# Altium PCB led_driver.PcbDoc
Units mm, origin at the board's own origin, x right, y up, seen from the top; angles counter-clockwise.
Board outline 42 x 44 mm, 4 copper layers (Top Layer, Layer 1, Layer 2, Bottom Layer), stack 0.603 mm thick; 25 components, 22 nets, 109 pads, 89 vias.
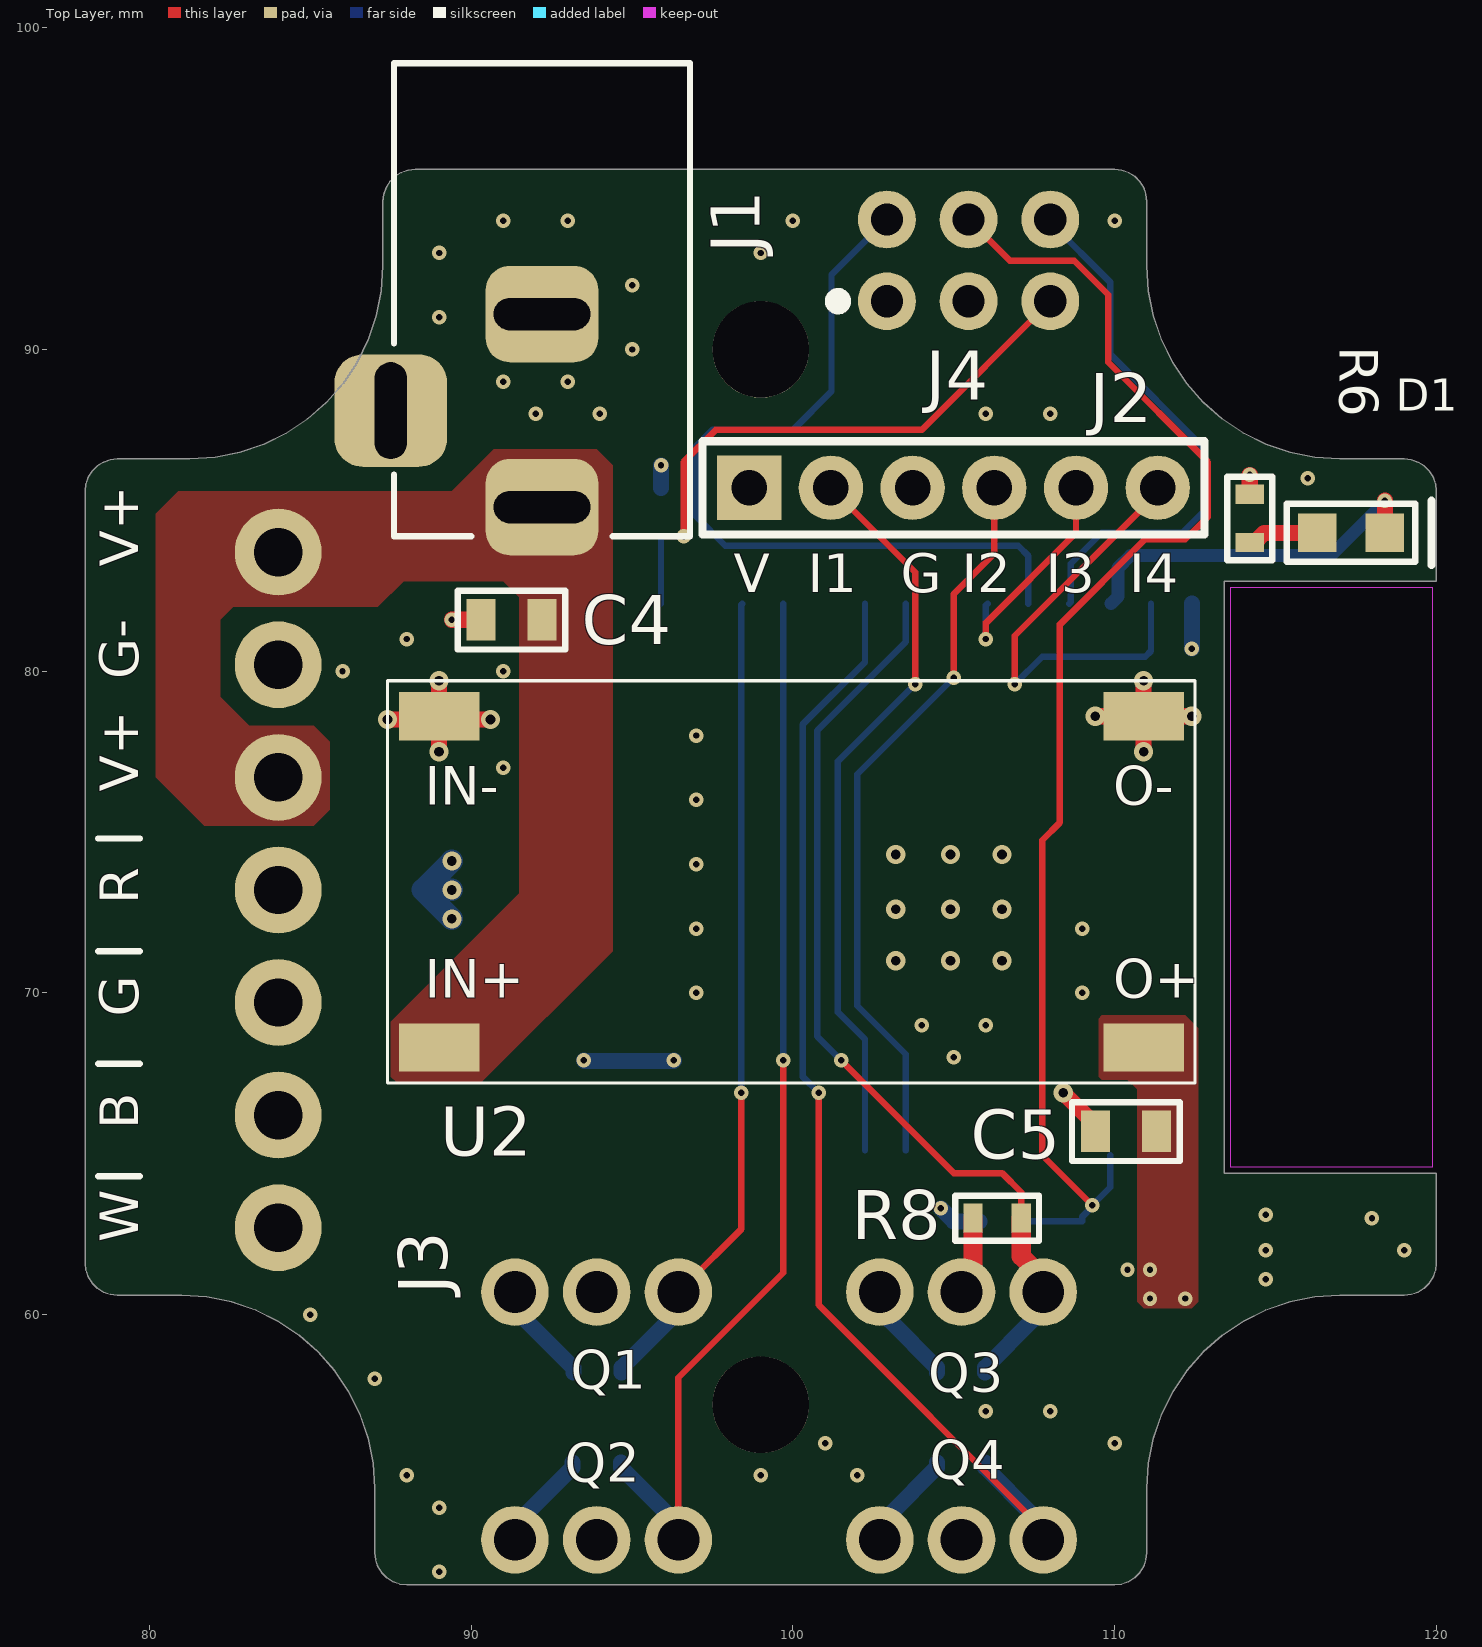
[diagram p0: Top Layer view]
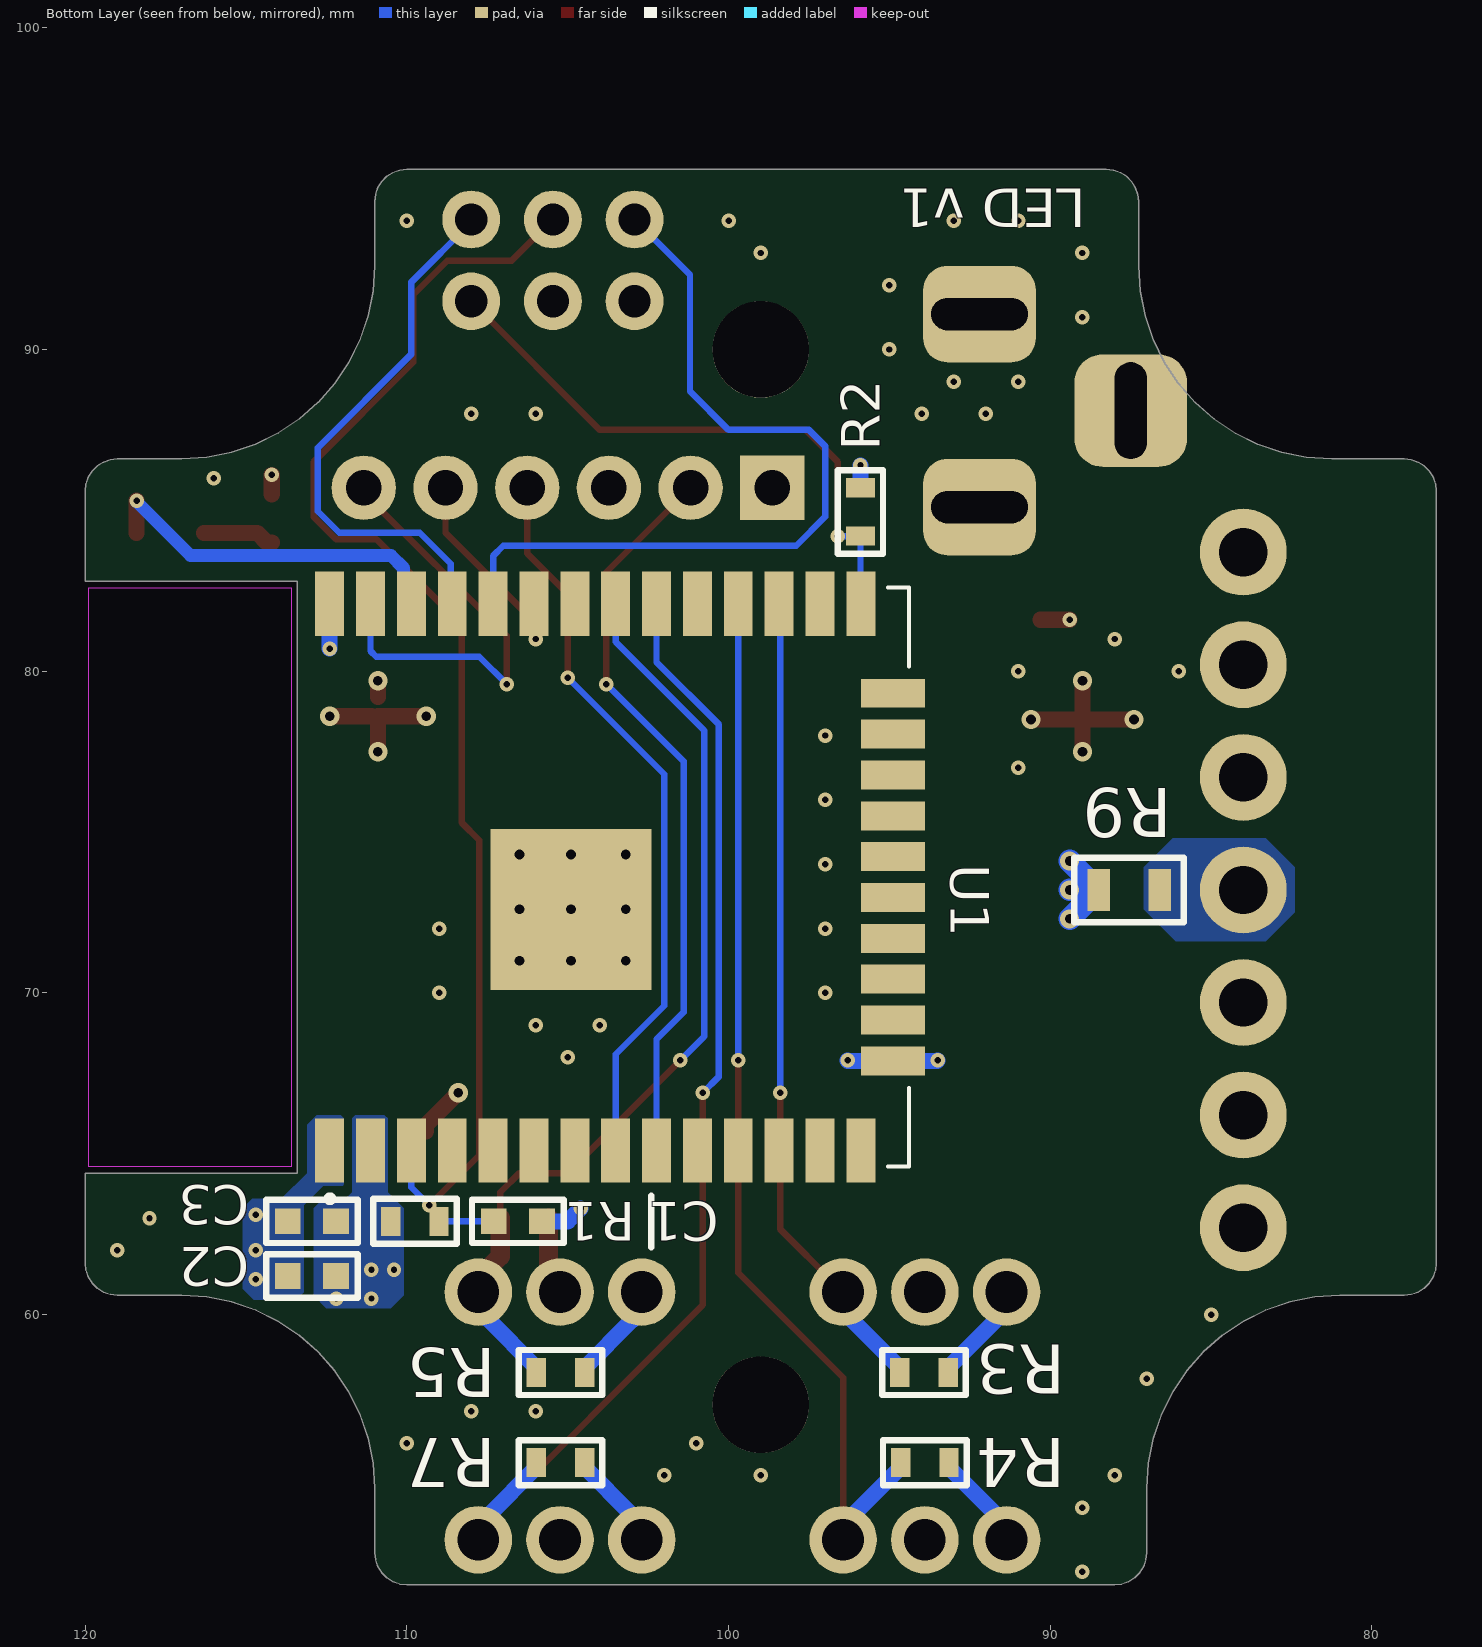
[diagram p1: Bottom Layer view, seen from below]
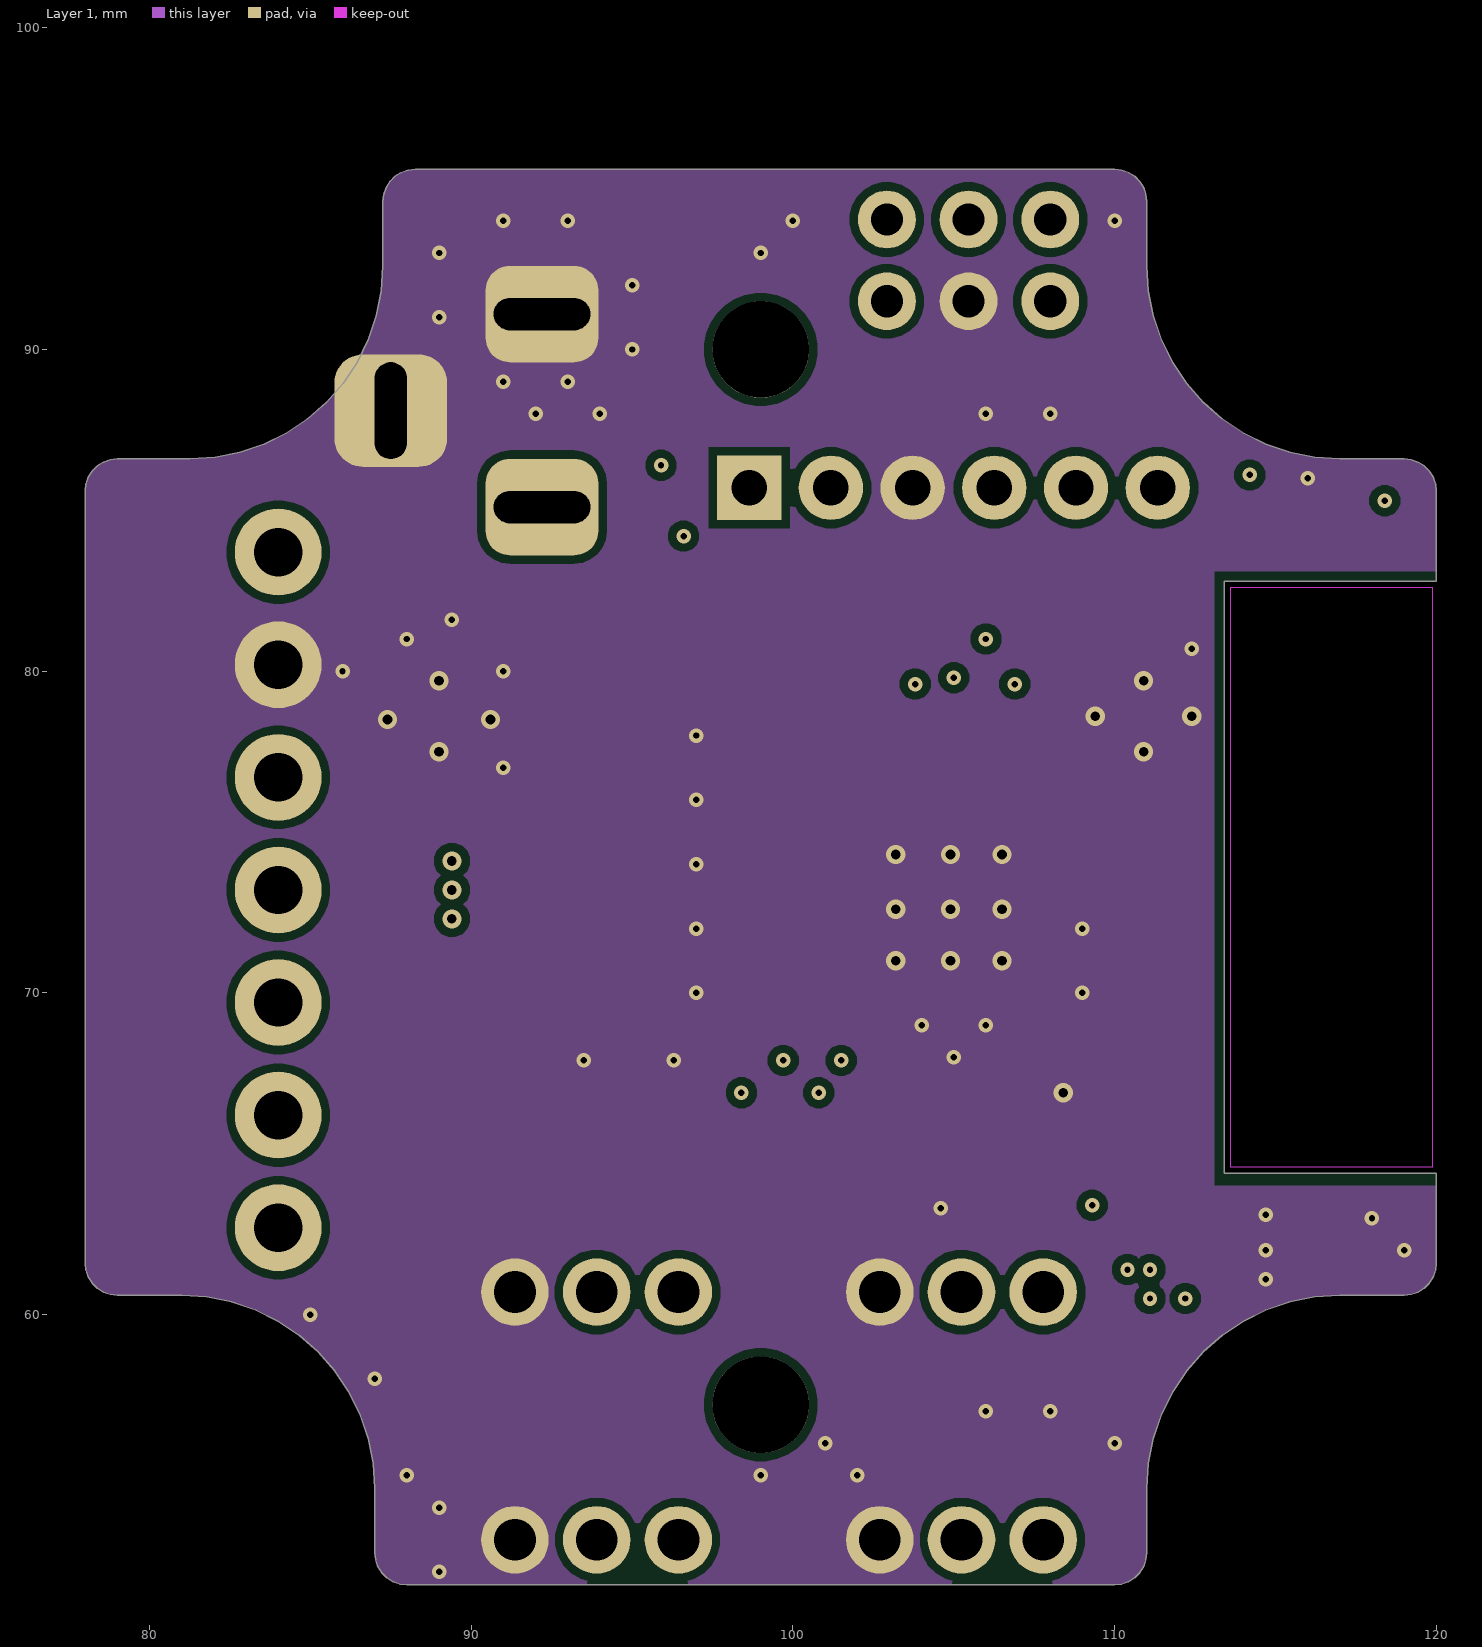
[diagram p2: Layer 1]
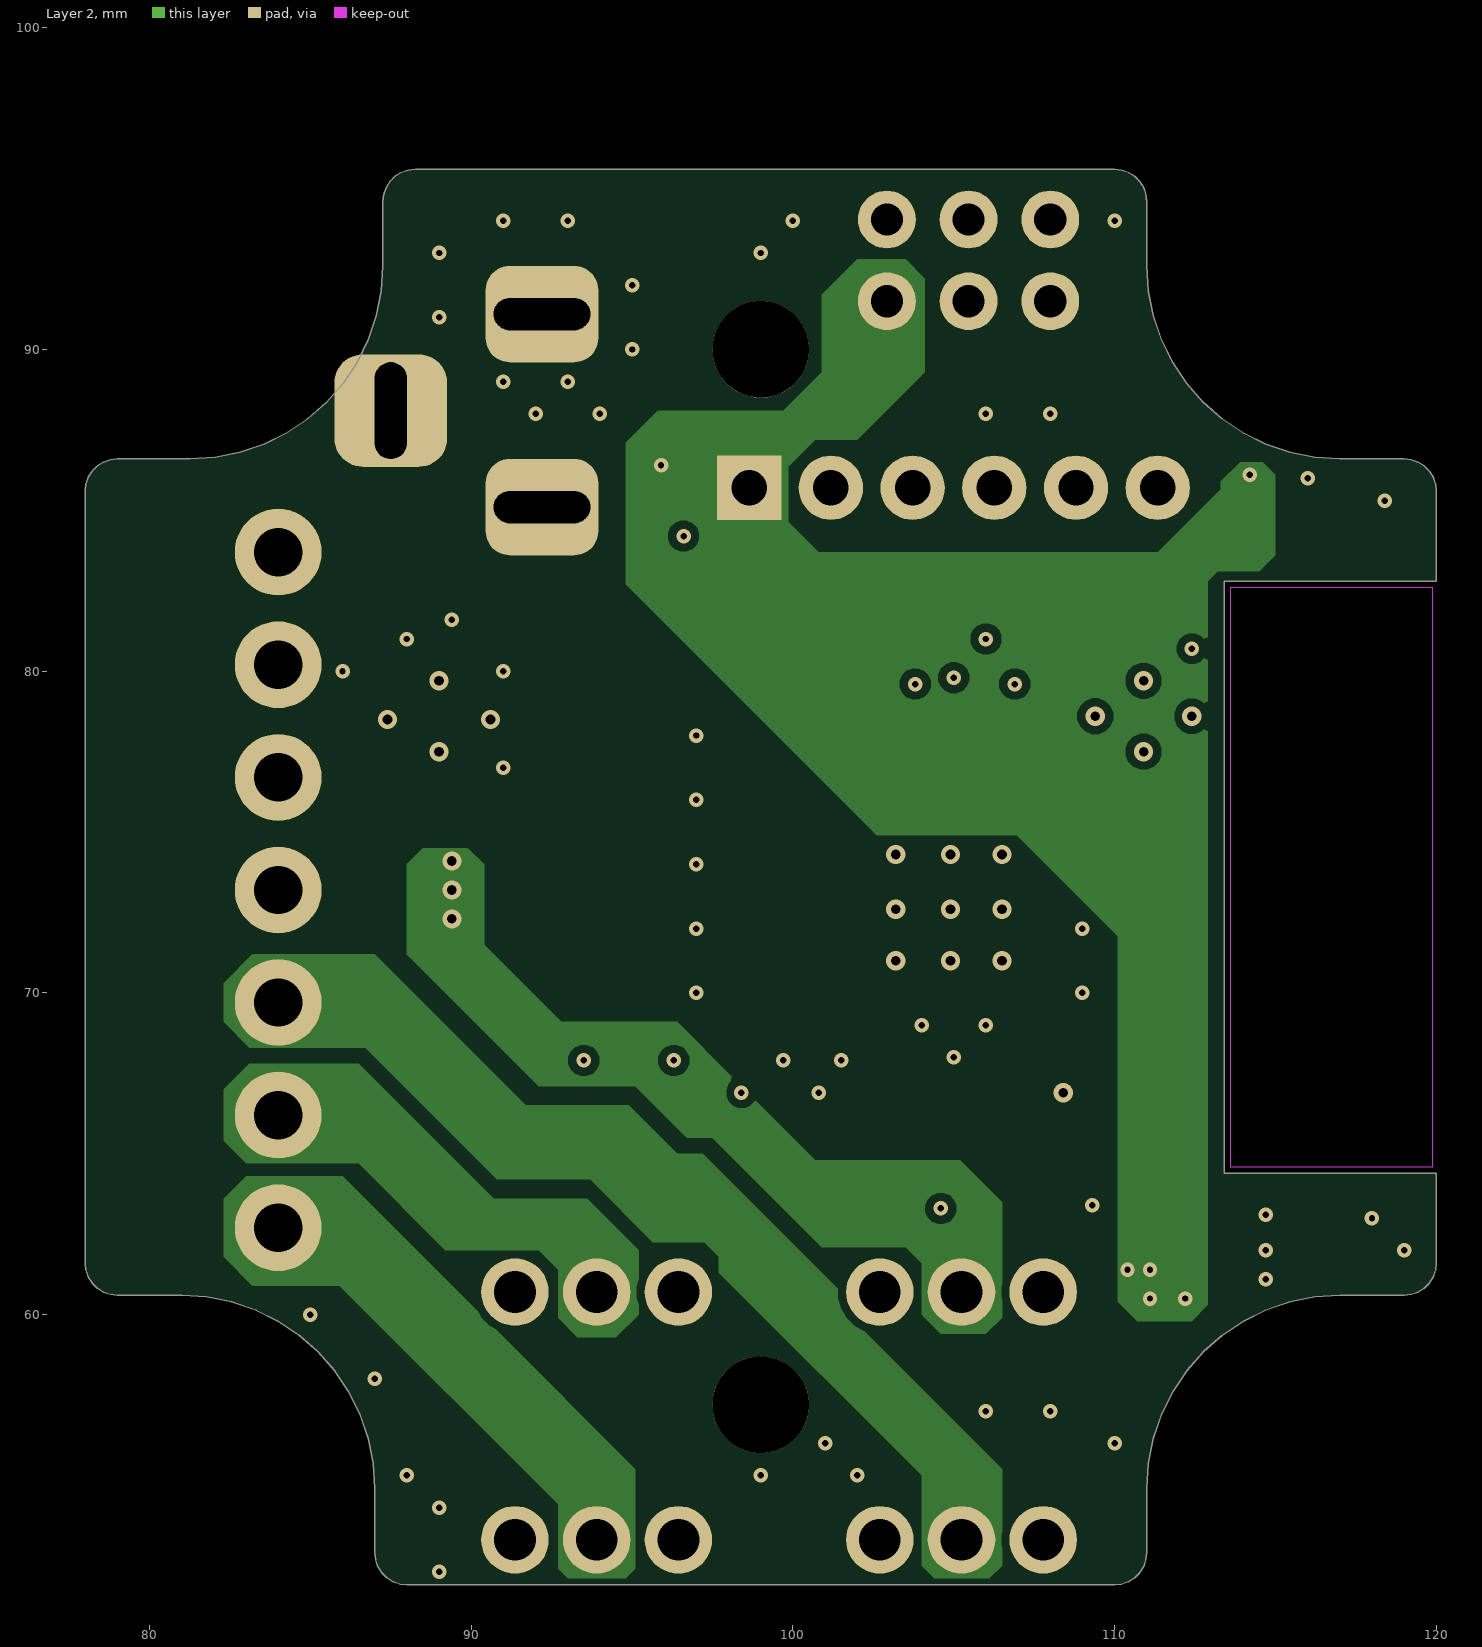
[diagram p3: Layer 2]
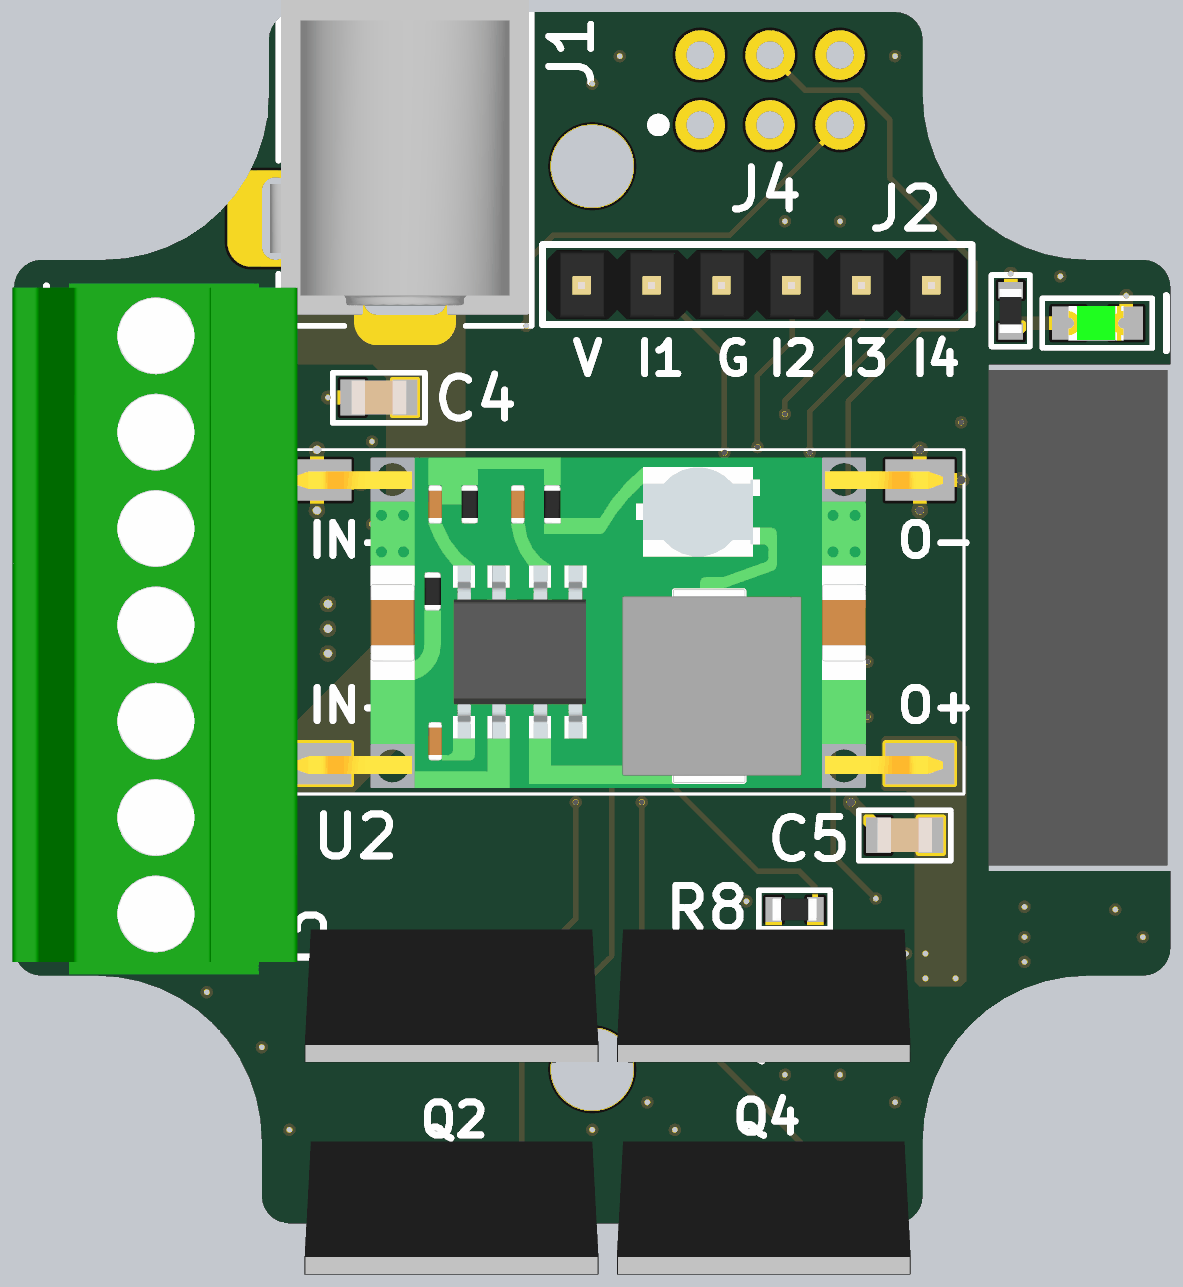
[diagram p4: 3D render of the assembled board from above, using the file's embedded part models]
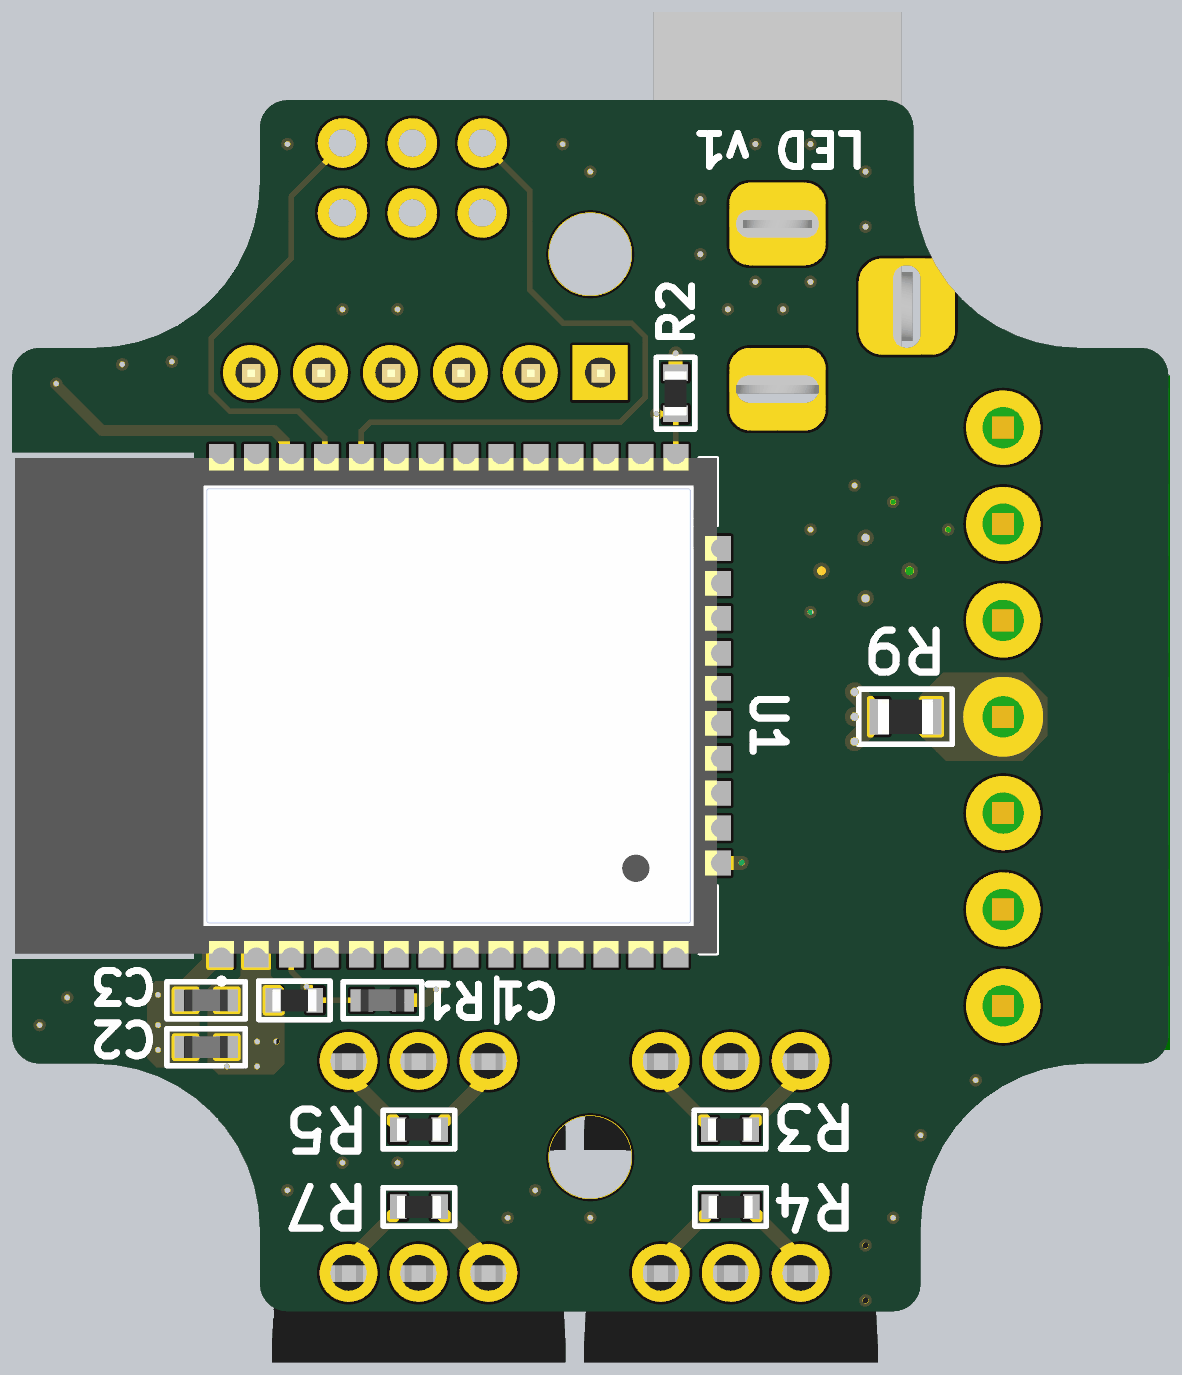
[diagram p5: 3D render of the assembled board from below, using the file's embedded part models]

## Layer stack, top to bottom
Top Solder: solder mask 0.0102, Solder Resist, Dk 3.5
Top Layer: signal copper 0.0356
Dielectric 2: prepreg 0.0711, PP-006, Dk 4.1
Layer 1: signal copper 0.035
Dielectric 1: dielectric 0.32, FR-4, Dk 4.8
Layer 2: signal copper 0.035
Dielectric 3: prepreg 0.0711, PP-006, Dk 4.1
Bottom Layer: signal copper 0.0356
Bottom Solder: solder mask 0.0102, Solder Resist, Dk 3.5

## Board outline
81.783,60.549 82.553,60.396 83.296,60.143 84,59.796 84.653,59.36 85.243,58.843 85.76,58.253 86.196,57.6 86.543,56.896 86.796,56.153 86.949,55.383 87,54.6 87,52.6 87.025,52.377 87.099,52.166 87.218,51.977 87.376,51.818 87.566,51.699 87.777,51.625 88,51.6 110,51.6 110.223,51.625 110.434,51.699 110.623,51.818 110.782,51.977 110.901,52.166 110.975,52.377 111,52.6 111,54.6 111.051,55.383 111.204,56.153 111.457,56.896 111.804,57.6 112.24,58.253 112.757,58.843 113.347,59.36 114,59.796 114.704,60.143 115.447,60.396 116.217,60.549 117,60.6 119,60.6 119.222,60.625 119.434,60.699 119.623,60.818 119.782,60.977 119.901,61.166 119.975,61.377 120,61.6 120,64.4 113.4,64.4 113.4,82.8 120,82.8 120,85.6 119.975,85.823 119.901,86.034 119.782,86.223 119.623,86.382 119.434,86.501 119.222,86.575 119,86.6 117,86.6 116.217,86.651 115.447,86.804 114.704,87.057 114,87.404 113.347,87.84 112.757,88.357 112.24,88.947 111.804,89.6 111.457,90.304 111.204,91.047 111.051,91.817 111,92.6 111,94.6 110.975,94.823 110.901,95.034 110.782,95.223 110.623,95.382 110.434,95.501 110.223,95.575 110,95.6 88.257,95.6 88.035,95.575 87.823,95.501 87.634,95.382 87.475,95.223 87.356,95.034 87.282,94.823 87.257,94.6 87.257,92.6 87.206,91.817 87.053,91.047 86.801,90.304 86.453,89.6 86.017,88.947 85.5,88.357 84.91,87.84 84.257,87.404 83.553,87.057 82.81,86.804 82.04,86.651 81.257,86.6 79,86.6 78.777,86.575 78.566,86.501 78.376,86.382 78.218,86.223 78.099,86.034 78.025,85.823 78,85.6 78,61.6 78.025,61.377 78.099,61.166 78.218,60.977 78.376,60.818 78.566,60.699 78.777,60.625 79,60.6 81,60.6

## Design rules (kind name [scope] priority, off if disabled: settings)
Clearance [All] p1: gap=0.254 ignorepadtopadclearanceinfootprint=FALSE except(0: Arc-Hole Track-Hole SMDPad-Hole THPad-Hole Via-Hole Fill-Hole Poly-Hole Region-Hole Text-Hole)
PolygonConnect [All] p1: connectstyle=Direct reliefconductorwidth=0.254 reliefentries=4 polygonreliefangle="90 Angle" airgapwidth=0.254
RoutingVias [All] p1: holewidth=0.711 width=1.27 viastyle="Through Hole" minholewidth=0.2 minwidth=0.45 maxholewidth=0.711 maxwidth=1.27
SolderMaskExpansion SolderMaskExpansion_VIA [IsVia] p1: expansion=0.102 istentingtop=TRUE
SolderMaskExpansion [All] p2: expansion=0.102 istentingtop=FALSE
Width [All] p1: maxlimit=5 minlimit=0.2 preferedwidth=0.254 midlayer1_minwidth=0.254 midlayer1_maxwidth=0.254 midlayer2_minwidth=0.254 midlayer2_maxwidth=0.254 minimp=50.000000 maximp=50.000000 favimp=50.000000
30 further rules are at their usual default settings.

## Components (designator, comment, footprint, x,y, rotation, side; value= is the part's Value field where it differs from the comment)
C1 "100nF" C0603 107.3,62.9 r180 bottom
C2 "10uF" C0603 113.7,61.2 r180 bottom
C3 "100nF" C0603 113.7,62.9 r180 bottom
C4 "47uF" C0805 91.05,81.6 r0 top
C5 "47uF" C0805 110.15,65.7 r0 top
D1 "GRN_LED" G_LED0805 116.3,84.3 r0 top
J1 "CONN" BarrelJack 92.2,85.1 r270 top
J2 "GOLDPIN_6" pin_header_6_male 98.64,85.7 r0 top
J3 "TerminalBlock-7way_3.5mm" TerminalBlock-7way 84,83.7 r270 top
J4 "GOLDPIN_2x3_2.54mm" PIN_HEADER_2x3_2.54mm 102.92,91.5 r90 top
Q1 "IRF540" IRF540 96.44,60.7 r180 top
Q2 "IRF540" IRF540 96.44,53 r180 top
Q3 "IRF540" IRF540 107.78,60.7 r180 top
Q4 "IRF540" IRF540 107.78,53 r180 top
R1 "10kR" R0603 109.75,62.9 r0 bottom
R2 "10kR" R0603 95.9,84.95 r90 bottom
R3 "10kR" R0603 93.925,58.2 r0 bottom
R4 "10kR" R0603 93.9,55.4 r0 bottom
R5 "10kR" R0603 105.225,58.2 r0 bottom
R6 "1kR" R0603 114.2,84.75 r90 top
R7 "10kR" R0603 105.225,55.4 r0 bottom
R8 "DNI" R0603 106.35,63 r0 top
R9 "DNI" R0805 87.55,73.2 r180 bottom
U1 "ESP32_WROOM" ESP32-WROOM-32 104.639,73.167 r90 bottom
U2 "360-Mini" DC-mini360-smd 99.5,73.2 r0 top

## Footprints (in the part's own frame and the unit in brackets; to place one, negate y for a bottom-side part, rotate by r counter-clockwise, add the part's x,y. Pads: shape width x height; smd on the part's side, far side on the other; paste and mask are expansions set on the pad)
BarrelJack [mm]
  rrect50% 3x3.5 hole 1 slot 3 at 90 deg: 1(0,0) 2(-6,0)
  rrect50% 3.5x3.5 hole 1 slot 3 at 0 deg: 3(-3,-4.7)
  silkscreen extent -13.8,-4.6 0.9,4.6, body extent -13.7,-4.9 0.5,4.5, height 11.05
C0603 [mm]
  rect 0.8x0.8 smd: 1(0,0) 2(1.5,0)
  silkscreen extent -0.67,-0.67 2.17,0.67, body extent -0.05,-0.4 1.55,0.4, height 0.45
C0805 [mm]
  rect 0.9x1.3 smd: 1(-0.75,0) 2(1.15,0)
  silkscreen extent -1.48,-0.92 1.88,0.9, body extent -0.8,-0.63 1.2,0.63, height 0.6
DC-mini360-smd [mm]
  rect 2.5x1.5 smd: 1(-10.5,-4.9) 2(-10.5,5.4) 3(11.4,5.4) 4(11.4,-4.9)
  silkscreen extent -12.1,-6 13,6.5, body extent -11.35,-5.78 12.25,6.22, height 3.88
ESP32-WROOM-32 [mm]
  rect 2x0.9 smd: 1(-8.067,7.761) 2(-8.067,6.491) 3(-8.067,5.221) 4(-8.067,3.951) 5(-8.067,2.681) 6(-8.067,1.411) 7(-8.067,0.141) 8(-8.067,-1.129) 9(-8.067,-2.399) 10(-8.067,-3.669) 11(-8.067,-4.939) 12(-8.067,-6.209) 13(-8.067,-7.479) 14(-8.067,-8.749) 25(8.933,-8.749) 26(8.933,-7.479) 27(8.933,-6.209) 28(8.933,-4.939) 29(8.933,-3.669) 30(8.933,-2.399) 31(8.933,-1.129) 32(8.933,0.141) 33(8.933,1.411) 34(8.933,2.681) 35(8.933,3.951) 36(8.933,5.221) 37(8.933,6.491) 38(8.933,7.761)
  rect 0.9x2 smd: 15(-5.282,-9.749) 16(-4.012,-9.749) 17(-2.742,-9.749) 18(-1.472,-9.749) 19(-0.202,-9.749) 20(1.068,-9.749) 21(2.338,-9.749) 22(3.608,-9.749) 23(4.878,-9.749) 24(6.148,-9.749)
  rect 5x5 smd: 39(-0.57,0.26)
  Keep-Out Layer region: 9.433,8.951 -8.567,8.951 -8.567,15.251 9.433,15.251
  silkscreen extent -9.67,-10.25 9.43,7.85, body extent -8.57,-10.25 9.43,15.25, height 3.2
G_LED0805 [mm]
  rect 1.2x1.2 smd: A(0,0) K(2.1,0)
  silkscreen extent -0.95,-1 3.55,1, body extent 0,-0.63 2,0.63, height 1.1
IRF540 [mm]
  round 2.1 hole 1.3: 1(0,0) 2(2.54,0) 3(5.08,0)
  body extent -2.79,-1.58 7.89,3.25, height 22.66
PIN_HEADER_2x3_2.54mm [mm]
  round 1.8 hole 1: 1(0,0) 2(2.54,0) 3(0,-2.54) 4(2.54,-2.54) 5(0,-5.08) 6(2.54,-5.08)
pin_header_6_male [mm]
  rect 2x2 hole 1.1: 1(0,0)
  round 2 hole 1.1: 2(2.54,0) 3(5.08,0) 4(7.62,0) 5(10.16,0) 6(12.7,0)
  silkscreen extent -1.45,-1.45 14.15,1.45, body extent -1.28,-1.28 13.96,1.26, height 9.2
R0603 [mm]
  rect 0.6x0.9 smd: 1(-0.75,0) 2(0.75,0)
  silkscreen extent -1.3,-0.7 1.3,0.7, body extent -0.8,-0.4 0.8,0.4, height 0.45
R0805 [mm]
  rect 0.7x1.3 smd: 1(-0.95,0) 2(0.95,0)
  silkscreen extent -1.7,-1 1.7,1, body extent -1,-0.63 1,0.63, height 0.6
TerminalBlock-7way [mm]
  round 2.7 hole 1.5: 1(0,0) 2(3.5,0) 3(7,0) 4(10.5,0) 5(14,0) 6(17.5,0) 7(21,0)
  body extent -2.05,-6.05 23.05,4.3, height 23.45

## Part data
C1 C2 C3 C4 C5: library part Cap_SMD
J1: library part DC-barrel
R1 R2 R3 R4 R5 R6 R7 R8 R9: library part Res

## Free pads (board coordinates)
  round 3 hole 3: 1(99,57.2) 1(99,90)

## Via types
v1: diameter 0.45, hole 0.2, Top Layer to Bottom Layer, tented both sides, 68 vias
v2: diameter 0.6, hole 0.3, Top Layer to Bottom Layer, tented both sides, 21 vias

## Nets (pads, with @x,y where several pads share a name; then routed paths per layer and width w, separated by ;. In a path a pad name is that pad's centre, name@x,y a point inside that pad or via, vN(x,y) a via of type N, cw(c..) or ccw(c..) an arc to the next point about the centre after c; other vN are vias at no path point)
+3V3: C2.2 C3.2 C5.2 J2.1 J4.1 R1.2 R2.2 R6.2 U1.2 U2.4 | length 1.3
  Top Layer w0.5: R6.2 v1(114.2,86.1)
  Bottom Layer w0.5: R2.2 v1(95.9,86.4)
  other v1: 111.1,60.5 112.2,60.5 110.4,61.4 111.1,61.4
BLUE: Q1.1 R3.2 U1.27 | length 25.1
  Top Layer w0.2: Q1.1@96.7,60.9 96.7,60.96 98.4,62.66 v1(98.4,66.9)
  Bottom Layer w0.2: v1(98.4,66.9) 98.4,82.07 U1.27
  Bottom Layer w0.5: R3.2 94.675,58.35 96.134,59.809 96.134,60.434 Q1.1@96.4,60.7
BOOT: J4.5 R2.1 U1.25 | length 18.6
  Top Layer w0.2: v1(96.6,84.2) 96.6,86.5 97.6,87.5 104,87.5 J4.5
  Bottom Layer w0.2: U1.25 95.9,82.11 R2.1 v1(96.6,84.2)
GND: C1.2 C2.1 C3.1 C4.1 C5.1 J1.2 J1.3 J2.3 J3.2 J4.3 Q1.3 Q2.3 Q3.3 Q4.3 R3.1 R4.1 R5.1 R7.1 U1.1 U1.15 U1.38 U1.39 U2.2 U2.3 | length 29.8
  Top Layer w0.5: v2(87.4,78.5) U2.2@89,78.5 ; v2(89,77.5) U2.2@89,78.5 ; U2.2 v2(89,79.7) ; U2.2@89.1,78.5 U2.2@89,78.5 ; U2.2@89.3,78.5 v2(90.6,78.5) ; v1(89.4,81.6) C4.1 ; v2(108.4,66.9) 109.4,65.9 C5.1 ; v2(109.4,78.6) U2.3 ; v2(110.9,77.5) U2.3@110.9,78.4 ; U2.3@110.9,79.2 v2(110.9,79.7) ; U2.3@111.1,78.6 v2(112.4,78.6)
  Bottom Layer w0.5: Q2.3@91.4,53.1 91.666,53.366 91.666,53.766 93.15,55.25 R4.1 ; Q1.3@91.4,60.6 91.666,60.334 91.666,59.859 93.175,58.35 R3.1 ; v1(93.5,67.9) 93.515,67.885 U1.15 96.285,67.885 v1(96.3,67.9) ; Q4.3 103.006,53.306 103.006,53.781 104.475,55.25 R7.1 ; Q3.3@102.7,60.6 103.006,60.294 103.006,59.819 104.475,58.35 R5.1 ; v1(104.6,63.3) 105,62.9 C1.2 ; v1(112.4,80.7) U1.38
  other v1: 89,52 89,54 88,55 99,55 102,55 101,56 110,56 106,57 108,57 87,58 85,60 114.7,61.1 114.7,62 119,62 118,63 114.7,63.1 105,68 104,69 106,69 97,70 109,70 97,72 109,72 97,74 97,76 91,77 97,78 86,80 91,80 88,81 116,86 92,88 94,88 106,88 108,88 91,89 93,89 95,90 89,91 95,92 89,93 99,93 91,94 93,94 100,94 110,94
  other v2: 103.2,71 104.9,71 106.5,71 103.2,72.6 104.9,72.6 106.5,72.6 103.2,74.3 104.9,74.3 106.5,74.3
GREEN: Q4.1 R7.2 U1.30 | length 36.1
  Top Layer w0.2: v1(100.8,66.9) 100.8,60.3 107.8,53.3 Q4.1@107.8,53
  Bottom Layer w0.2: v1(100.8,66.9) 100.3,67.4 100.3,78.342 102.24,80.282 U1.30
  Bottom Layer w0.5: R7.2 105.975,55.25 107.474,53.751 107.474,53.226 Q4.1@107.7,53
IO1: J2.2 U1.9 | length 23.1
  Top Layer w0.2: J2.2@101.1,85.7 J2.2 103.8,83.08 v1(103.8,79.6)
  Bottom Layer w0.2: U1.9 102.24,68.56 101.4,69.4 101.4,77.2 v1(103.8,79.6)
IO2: J2.4 U1.8 | length 23
  Top Layer w0.2: v1(105,79.8) 105,82.4 106.26,83.66 J2.4
  Bottom Layer w0.2: U1.8 103.51,67.21 103.51,68.09 102,69.6 102,76.8 v1(105,79.8)
IO3: J2.5 U1.33 | length 7
  Top Layer w0.2: v1(106,81) 106,81.5 108.8,84.3 J2.5
  Bottom Layer w0.2: v1(106,81) 106,82.05 U1.33
IO4: J2.6 U1.37 | length 14
  Top Layer w0.2: v1(106.9,79.6) 106.9,81.1 111.3,85.5 J2.6@111.3,85.7
  Bottom Layer w0.2: v1(106.9,79.6) 107.75,80.45 110.95,80.45 111.13,80.63 U1.37
NetD1_A: D1.A R6.1 | length 2.2
  Top Layer w0.5: R6.1 114.35,84 114.65,84.3 D1.A
NetJ3_4: J3.4 R9.2
NetJ3_5: J3.5 Q4.2
NetJ3_6: J3.6 Q1.2
NetJ3_7: J3.7 Q2.2
NetQ3_2: Q3.2 R8.1 R9.1 | length 5.9
  Top Layer w0.6: Q3.2@105.2,60.7 105.2,61.066 105.6,61.466 R8.1
  Bottom Layer w0.7: v2(89.4,72.3) R9.1 ; v2(89.4,73.2) R9.1 ; v2(89.4,74.1) R9.1
RED: Q3.1 R5.2 R8.2 U1.31 | length 29.5
  Top Layer w0.2: v1(101.5,67.9) 105,64.4 106.5,64.4 107.1,63.8 R8.2
  Top Layer w0.6: R8.2 107.1,61.813 107.8,61.113 Q3.1@107.8,60.8
  Bottom Layer w0.2: v1(101.5,67.9) 100.754,68.646 100.754,78.154 103.51,80.91 U1.31
  Bottom Layer w0.5: R5.2 105.975,58.35 107.474,59.849 107.474,60.374 Q3.1@107.8,60.7
RST: C1.1 J4.4 R1.1 U1.3 | length 42.5
  Top Layer w0.2: J4.4 106.746,92.754 108.746,92.754 109.8,91.7 109.8,89.6 112.9,86.5 112.9,84.8 112.2,84.1 110.946,84.1 108.3,81.454 108.3,75.298 107.746,74.744 107.746,64.954 v1(109.3,63.4)
  Bottom Layer w0.2: C1.1 R1.1 109,63.05 109.3,63.35 v1(109.3,63.4) 109.86,63.96 U1.3@109.86,64.96
RX_BOOT: J4.2 U1.34 | length 25.4
  Bottom Layer w0.2: J4.2@102.8,94 102.8,93.92 101.2,92.32 101.2,88.7 100,87.5 97.5,87.5 97,87 97,84.8 97.9,83.9 107,83.9 107.32,83.58 U1.34
TX_BOOT: J4.6 U1.35 | length 17.1
  Bottom Layer w0.2: J4.6 108,93.955 109.858,92.098 109.858,89.858 112.775,86.94 112.775,84.975 112.1,84.3 109.6,84.3 108.64,83.34 108.64,82.15 U1.35
Vin: C4.2 J1.1 J3.1 J3.3 U2.1
WHITE: Q2.1 R4.2 U1.28 | length 33.3
  Top Layer w0.2: Q2.1@96.4,53.3 96.44,53.34 96.44,58.04 99.7,61.3 v1(99.7,67.9)
  Bottom Layer w0.2: v1(99.7,67.9) U1.28
  Bottom Layer w0.5: R4.2 94.65,55.25 96.134,53.766 96.134,53.366 Q2.1@96.5,53
WIFI_INDICATOR: D1.K U1.36 | length 11.4
  Top Layer w0.5: D1.K v1(118.4,85.3)
  Bottom Layer w0.4: U1.36@109.89,82.1 110.11,82.321 110.11,83.213 110.497,83.6 116.73,83.6 118.39,85.261 118.39,85.277 v1@118.4,85.277
pads on no net: U1.4 U1.5 U1.6 U1.7 U1.10 U1.11 U1.12 U1.13 U1.14 U1.16 U1.17 U1.18 U1.19 U1.20 U1.21 U1.22 U1.23 U1.24 U1.26 U1.29 U1.32

## Polygon pours and split planes (outlines as drawn)
Vin on Top Layer "NONET_L-01_P-001" (solid, pour order 4): 85.6,77.8 85.1,78.3 83.1,78.3 82.2,79.2 82.2,81.6 82.6,82 87.1,82 87.9,82.8 91,82.8 91.5,82.3 91.5,73.1 87.5,69.1 87.5,67.4 87.7,67.2 90.3,67.2 94.4,71.3 94.4,86.4 93.9,86.9 90.7,86.9 89.4,85.6 80.9,85.6 80.2,84.9 80.2,76.7 81.7,75.2 85.1,75.2 85.6,75.7
+3V3 on Top Layer "NONET_L-01_P-001" (solid, pour order 0): 110.7,60.4 110.9,60.2 112.4,60.2 112.6,60.4 112.6,68.9 112.2,69.3 109.6,69.3 109.5,69.2 109.5,67.4 109.6,67.3 110.4,67.3 110.7,67
+3V3 on Bottom Layer "NONET_L-01_P-001" (solid, pour order 2): 110.1,60.6 110.5,60.2 112.5,60.2 112.9,60.6 112.9,63.3 112.6,63.6 111.9,63.6 111.7,63.8 111.7,66.1 111.6,66.2 110.7,66.2 110.6,66.1 110.6,63.8 110.1,63.3 110.1,62.5
GND on Bottom Layer "NONET_L-01_P-001" (solid, pour order 3): 113.2,60.7 113.2,63.4 112.6,64 112,64 111.9,64.1 111.9,66.1 112,66.2 112.8,66.2 113.1,65.9 113.1,64.4 113.9,63.6 114.8,63.6 115.1,63.3 115.1,60.8 114.762,60.462 113.438,60.462
NetJ3_4 on Bottom Layer "NONET_L-01_P-001" (solid, pour order 7): 86.1,71.6 84.7,71.6 83.3,71.6 82.4,72.5 82.4,73.9 83.3,74.8 85.2,74.8 86.2,74.8 87.1,73.9 87.1,72.6
+3V3 on Layer 2 "NONET_L-01_P-001" (solid, pour order 6): 100.8,83.7 111.347,83.7 113.3,85.653 113.3,85.9 113.9,86.5 114.6,86.5 115,86.1 115,83.6 114.5,83.1 113.2,83.1 112.9,82.8 112.9,81.5 112.9,60.3 112.4,59.8 110.7,59.8 110.1,60.4 110.1,71.757 107.757,74.1 106.957,74.9 102.6,74.9 94.8,82.7 94.8,86.2 94.8,87.1 95.8,88.1 99.7,88.1 100.9,89.3 100.9,91.7 102,92.8 103.5,92.8 104.1,92.2 104.1,89.3 102,87.2 100.7,87.2 99.862,86.362 99.862,84.638
NetJ3_6 on Layer 2 "NONET_L-01_P-001" (solid, pour order 9): 83,64.7 82.3,65.4 82.3,67 83.1,67.8 86.5,67.8 90.7,63.6 93.6,63.6 95.2,62 95.2,60 94.5,59.3 93.3,59.3 92.7,59.9 92.7,61.4 92.1,62 89.2,62 86.5,64.7
NetJ3_7 on Layer 2 "NONET_L-01_P-001" (solid, pour order 8): 92.7,52.1 92.7,54.1 85.9,60.9 83.2,60.9 82.3,61.8 82.3,63.6 83,64.3 86,64.3 95.1,55.2 95.1,52.1 94.8,51.8 93,51.8
NetJ3_5 on Layer 2 "NONET_L-01_P-001" (solid, pour order 10): 97.2,65 96.4,65 94.9,66.5 91.7,66.5 87,71.2 83.2,71.2 82.3,70.3 82.3,69.1 83.1,68.3 86.7,68.3 90.8,64.2 93.7,64.2 95.65,62.25 97.25,62.25 97.7,61.8 97.7,61.3 104,55 104,52.2 104.4,51.8 106.1,51.8 106.5,52.2 106.5,55.2 101.5,60.2 101.5,60.7
NetQ3_2 on Layer 2 "NONET_L-01_P-001" (solid, pour order 11): 104,60 104,61.6 103.5,62.1 100.9,62.1 97.5,65.5 96.7,65.5 95.1,67.1 92.1,67.1 88,71.2 88,74 88.5,74.5 89.9,74.5 90.4,74 90.4,71.5 92.8,69.1 96.4,69.1 100.7,64.8 105.2,64.8 106.5,63.5 106.5,59.9 106,59.4 104.6,59.4
GND on Layer 1 "NONET_L-01_P-001" (solid, pour order 5): 120,83.1 113.1,83.1 113.1,64 120,64 120,61.6 119.975,61.377 119.901,61.166 119.782,60.977 119.623,60.818 119.434,60.699 119.222,60.625 119,60.6 117,60.6 116.217,60.549 115.447,60.396 114.704,60.143 114,59.796 113.347,59.36 112.757,58.843 112.24,58.253 111.804,57.6 111.457,56.896 111.204,56.153 111.051,55.383 111,54.6 111,52.6 110.975,52.377 110.901,52.166 110.782,51.977 110.623,51.818 110.434,51.699 110.223,51.625 110,51.6 88,51.6 87.777,51.625 87.566,51.699 87.376,51.818 87.218,51.977 87.099,52.166 87.025,52.377 87,52.6 87,54.6 86.949,55.383 86.796,56.153 86.543,56.896 86.196,57.6 85.76,58.253 85.243,58.843 84.653,59.36 84,59.796 83.296,60.143 82.553,60.396 81.783,60.549 81,60.6 79,60.6 78.777,60.625 78.566,60.699 78.376,60.818 78.218,60.977 78.099,61.166 78.025,61.377 78,61.6 78,85.6 78.025,85.823 78.099,86.034 78.218,86.223 78.376,86.382 78.566,86.501 78.777,86.575 79,86.6 81.257,86.6 82.04,86.651 82.81,86.804 83.553,87.057 84.257,87.404 84.91,87.84 85.5,88.357 86.017,88.947 86.453,89.6 86.801,90.304 87.053,91.047 87.206,91.817 87.257,92.6 87.257,94.6 87.282,94.823 87.356,95.034 87.475,95.223 87.634,95.382 87.823,95.501 88.035,95.575 88.257,95.6 110,95.6 110.223,95.575 110.434,95.501 110.623,95.382 110.782,95.223 110.901,95.034 110.975,94.823 111,94.6 111,92.6 111.051,91.817 111.204,91.047 111.457,90.304 111.804,89.6 112.24,88.947 112.757,88.357 113.347,87.84 114,87.404 114.704,87.057 115.447,86.804 116.217,86.651 117,86.6 119,86.6 119.222,86.575 119.434,86.501 119.623,86.382 119.782,86.223 119.901,86.034 119.975,85.823 120,85.6

## Silkscreen, mask and mechanical layers (free items; w line width, h text height)
Top Overlay:
  circle w0.254: c101.4,91.4 r0.1
  circle w0.254: c101.4,91.5 r0.2
  circle w0.254: c101.4,91.5 r0.283
  lines w0.2: 78.4,64.3 79.7,64.3 ; 78.4,67.8 79.7,67.8 ; 78.4,71.3 79.7,71.3 ; 78.4,74.8 79.7,74.8
  text "V+" at 79.646,83.254 h1.2 r90
  text "V" at 98.154,82.454 h1.2
  text "I1" at 100.454,82.454 h1.2
  text "G" at 103.354,82.454 h1.2
  text "I2" at 105.254,82.454 h1.2
  text "I3" at 107.854,82.454 h1.2
  text "I4" at 110.454,82.454 h1.2
  text "G-" at 79.646,79.754 h1.2 r90
  text "V+" at 79.646,76.254 h1.2 r90
  text "R" at 79.646,72.754 h1.2 r90
  text "G" at 79.646,69.254 h1.2 r90
  text "B" at 79.646,65.754 h1.2 r90
  text "W" at 79.646,62.254 h1.2 r90
Bottom Overlay:
  lines w0.2: 102.4,62.1 102.4,63.7
  text "LED v1" at 88.9,95 h1.2 r180
Mechanical 1:
  the board outline again, w0.3

## Text inside footprints (layer, text, board x,y; h text height)
U2: Top Overlay "O+" at 109.954,69.854 h1.2; Top Overlay "IN-" at 88.554,75.854 h1.2; Top Overlay "O-" at 109.954,75.854 h1.2; Top Overlay "IN+" at 88.554,69.854 h1.2